# EAGLE board SOIC_TSSOP-16 adapter_and_proto (EAGLE 7.3.0)
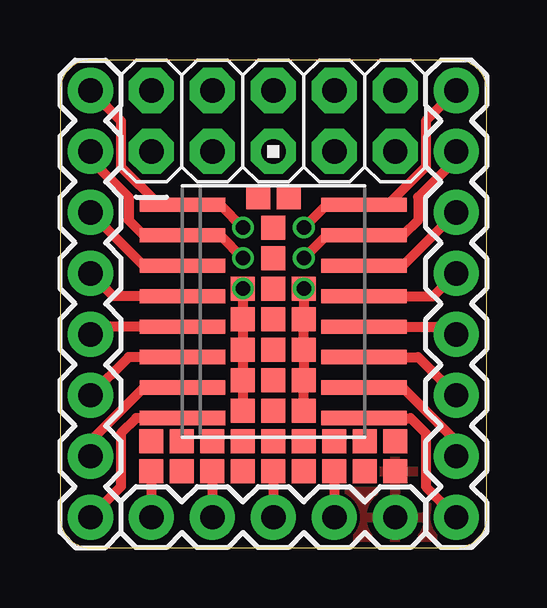
[diagram p0: board, top side]
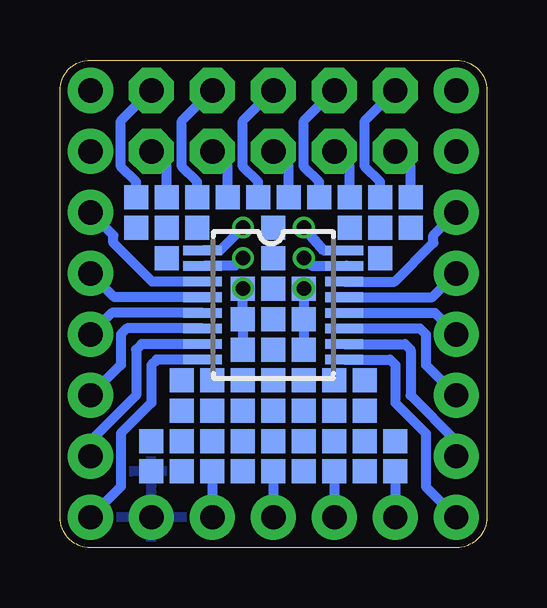
[diagram p1: board, bottom side, seen from below]

Size 17.78 x 20.32 mm. Coordinates in mm from the lower left corner, seen from the top.
Outline: 16.51,20.32 1.27,20.32 arc90 0,19.05 0,1.27 arc90 1.27,0 16.51,0 arc90 17.78,1.27 17.78,19.05 arc90 16.51,20.32
Copper layers (1*16): Top 0.035mm / dielectric 1.5mm / Bottom 0.035mm
Design rules "dirt_cheap_dirty_boards.v1": minimum track width 5mil, minimum drill 12mil, track to track 5mil, track to pad 5mil, pad to pad 5mil, via to via 5mil, smd to smd 0mil, copper to edge 10mil, drill to drill 10mil, minimum pad ring 10mil, minimum via ring 6mil, stop-mask expansion 2mil, vias tented up to drill 25mil, thermal gap 10mil

## Footprints (pad centres in the part's own frame; a part is rotated, then mirrored left to right if it is on the bottom)
1X08_ROUND = drill 1.016 pad 1.88: 1 0,0; 2 2.54,0; 3 5.08,0; 4 7.62,0; 5 10.16,0; 6 12.7,0; 7 15.24,0; 8 17.78,0
AVR_ICSP = drill 1.016 pad 1.88 octagon: 1 -1.27,5.08; 2 1.27,5.08; 3 -1.27,2.54; 4 1.27,2.54; 5 -1.27,0; 6 1.27,0; 7 -1.27,-2.54; 8 1.27,-2.54; 9 -1.27,-5.08; 10 1.27,-5.08
1X05 = drill 1.016 pad 1.88: 1 0,0; 2 2.54,0; 3 5.08,0; 4 7.62,0; 5 10.16,0
SOIC-16NW = smd 0.6 x 3.56: P1 -4.445,-3.78; P2 -3.175,-3.78; P3 -1.905,-3.78; P4 -0.635,-3.78; P5 0.635,-3.78; P6 1.905,-3.78; P7 3.175,-3.78; P8 4.445,-3.78; P9 4.445,3.78; P10 3.175,3.78; P11 1.905,3.78; P12 0.635,3.78; P13 -0.635,3.78; P14 -1.905,3.78; P15 -3.175,3.78; P16 -4.445,3.78
TP10SQ = smd 1 x 1: TP 0,0
TSSOP16 = smd 0.4 x 1.6: 1 -2.225,-2.85; 2 -1.575,-2.85; 3 -0.925,-2.85; 4 -0.275,-2.85; 5 0.375,-2.85; 6 1.025,-2.85; 7 1.675,-2.85; 8 2.325,-2.85; 9 2.325,3.05; 10 1.675,3.05; 11 1.025,3.05; 12 0.375,3.05; 13 -0.275,3.05; 14 -0.925,3.05; 15 -1.575,3.05; 16 -2.225,3.05

## Placement (x,y rotation side)
JP1  [1X08_ROUND]  1.27,1.27 90 top
JP2  [1X08_ROUND]  16.51,19.05 270 top
JP3  [AVR_ICSP]  8.89,17.78 90 top
JP4  [1X05]  3.81,1.27 0 top
SOIC-16  [SOIC-16NW]  8.89,9.84 270 top
TP1  TPSQTP10SQ  [TP10SQ]  3.17,14.61 0 bottom
TP2  TPSQTP10SQ  [TP10SQ]  5.71,14.61 0 bottom
TP3  TPSQTP10SQ  [TP10SQ]  8.26,14.61 0 bottom
TP4  TPSQTP10SQ  [TP10SQ]  10.79,14.61 0 bottom
TP5  TPSQTP10SQ  [TP10SQ]  13.34,14.61 0 bottom
TP6  TPSQTP10SQ  [TP10SQ]  4.45,14.61 0 bottom
TP7  TPSQTP10SQ  [TP10SQ]  6.99,14.61 0 bottom
TP8  TPSQTP10SQ  [TP10SQ]  9.53,14.61 0 bottom
TP9  TPSQTP10SQ  [TP10SQ]  12.06,14.61 0 bottom
TP10  TPSQTP10SQ  [TP10SQ]  14.61,14.61 0 bottom
TP11  TPSQTP10SQ  [TP10SQ]  13.97,3.17 0 bottom
TP12  TPSQTP10SQ  [TP10SQ]  11.43,3.17 0 top
TP13  TPSQTP10SQ  [TP10SQ]  8.89,3.17 0 top
TP14  TPSQTP10SQ  [TP10SQ]  6.35,3.17 0 top
TP15  TPSQTP10SQ  [TP10SQ]  3.81,3.17 0 top
TP16  TPSQTP10SQ  [TP10SQ]  11.43,3.17 0 bottom
TP17  TPSQTP10SQ  [TP10SQ]  8.89,3.17 0 bottom
TP18  TPSQTP10SQ  [TP10SQ]  6.35,3.17 0 bottom
TP19  TPSQTP10SQ  [TP10SQ]  3.81,3.17 0 bottom
TP20  TPSQTP10SQ  [TP10SQ]  13.97,3.17 0 top
TP21  TPSQTP10SQ  [TP10SQ]  12.7,3.17 0 bottom
TP22  TPSQTP10SQ  [TP10SQ]  10.16,3.17 0 bottom
TP23  TPSQTP10SQ  [TP10SQ]  7.62,3.17 0 bottom
TP24  TPSQTP10SQ  [TP10SQ]  5.08,3.17 0 bottom
TP25  TPSQTP10SQ  [TP10SQ]  7.62,10.79 0 bottom
TP26  TPSQTP10SQ  [TP10SQ]  7.62,9.53 0 bottom
TP27  TPSQTP10SQ  [TP10SQ]  7.62,8.26 0 bottom
TP28  TPSQTP10SQ  [TP10SQ]  10.16,10.79 0 bottom
TP29  TPSQTP10SQ  [TP10SQ]  10.16,9.53 0 bottom
TP30  TPSQTP10SQ  [TP10SQ]  10.16,8.26 0 bottom
TP31  TPSQTP10SQ  [TP10SQ]  10.16,10.79 0 top
TP32  TPSQTP10SQ  [TP10SQ]  10.16,9.53 0 top
TP33  TPSQTP10SQ  [TP10SQ]  10.16,8.26 0 top
TP34  TPSQTP10SQ  [TP10SQ]  10.16,6.99 0 top
TP35  TPSQTP10SQ  [TP10SQ]  10.16,5.71 0 top
TP36  TPSQTP10SQ  [TP10SQ]  7.62,10.79 0 top
TP37  TPSQTP10SQ  [TP10SQ]  7.62,9.53 0 top
TP38  TPSQTP10SQ  [TP10SQ]  7.62,8.26 0 top
TP39  TPSQTP10SQ  [TP10SQ]  7.62,6.99 0 top
TP40  TPSQTP10SQ  [TP10SQ]  7.62,5.71 0 top
TP41  TPSQTP10SQ  [TP10SQ]  5.08,3.17 0 top
TP42  TPSQTP10SQ  [TP10SQ]  7.62,3.17 0 top
TP43  TPSQTP10SQ  [TP10SQ]  10.16,3.17 0 top
TP44  TPSQTP10SQ  [TP10SQ]  12.7,3.17 0 top
TP45  TPSQTP10SQ  [TP10SQ]  8.89,5.71 0 top
TP46  TPSQTP10SQ  [TP10SQ]  8.89,6.99 0 top
TP47  TPSQTP10SQ  [TP10SQ]  8.89,8.26 0 top
TP48  TPSQTP10SQ  [TP10SQ]  7.62,4.45 0 top
TP49  TPSQTP10SQ  [TP10SQ]  6.35,4.45 0 top
TP50  TPSQTP10SQ  [TP10SQ]  8.89,12.06 0 top
TP51  TPSQTP10SQ  [TP10SQ]  8.89,13.34 0 top
TP52  TPSQTP10SQ  [TP10SQ]  8.89,4.45 0 top
TP53  TPSQTP10SQ  [TP10SQ]  10.16,4.45 0 top
TP54  TPSQTP10SQ  [TP10SQ]  5.08,4.45 0 top
TP55  TPSQTP10SQ  [TP10SQ]  11.43,4.45 0 top
TP56  TPSQTP10SQ  [TP10SQ]  12.7,4.45 0 top
TP57  TPSQTP10SQ  [TP10SQ]  8.26,14.61 0 top
TP58  TPSQTP10SQ  [TP10SQ]  9.53,14.61 0 top
TP59  TPSQTP10SQ  [TP10SQ]  8.89,12.06 0 bottom
TP60  TPSQTP10SQ  [TP10SQ]  8.89,13.34 0 bottom
TP61  TPSQTP10SQ  [TP10SQ]  5.71,13.34 0 bottom
TP62  TPSQTP10SQ  [TP10SQ]  4.45,13.34 0 bottom
TP63  TPSQTP10SQ  [TP10SQ]  4.45,12.06 0 bottom
TP64  TPSQTP10SQ  [TP10SQ]  12.06,13.34 0 bottom
TP65  TPSQTP10SQ  [TP10SQ]  13.34,13.34 0 bottom
TP66  TPSQTP10SQ  [TP10SQ]  13.34,12.06 0 bottom
TP67  TPSQTP10SQ  [TP10SQ]  14.61,13.34 0 bottom
TP68  TPSQTP10SQ  [TP10SQ]  3.17,13.34 0 bottom
TP69  TPSQTP10SQ  [TP10SQ]  8.89,8.26 0 bottom
TP70  TPSQTP10SQ  [TP10SQ]  5.08,6.99 0 bottom
TP71  TPSQTP10SQ  [TP10SQ]  5.08,5.71 0 bottom
TP72  TPSQTP10SQ  [TP10SQ]  5.08,4.45 0 bottom
TP73  TPSQTP10SQ  [TP10SQ]  6.35,4.45 0 bottom
TP74  TPSQTP10SQ  [TP10SQ]  6.35,5.71 0 bottom
TP75  TPSQTP10SQ  [TP10SQ]  6.35,6.99 0 bottom
TP76  TPSQTP10SQ  [TP10SQ]  7.62,6.99 0 bottom
TP77  TPSQTP10SQ  [TP10SQ]  7.62,5.71 0 bottom
TP78  TPSQTP10SQ  [TP10SQ]  7.62,4.45 0 bottom
TP79  TPSQTP10SQ  [TP10SQ]  8.89,4.45 0 bottom
TP80  TPSQTP10SQ  [TP10SQ]  8.89,5.71 0 bottom
TP81  TPSQTP10SQ  [TP10SQ]  8.89,6.99 0 bottom
TP82  TPSQTP10SQ  [TP10SQ]  10.16,6.99 0 bottom
TP83  TPSQTP10SQ  [TP10SQ]  10.16,5.71 0 bottom
TP84  TPSQTP10SQ  [TP10SQ]  10.16,4.45 0 bottom
TP85  TPSQTP10SQ  [TP10SQ]  11.43,4.45 0 bottom
TP86  TPSQTP10SQ  [TP10SQ]  11.43,5.71 0 bottom
TP87  TPSQTP10SQ  [TP10SQ]  11.43,6.99 0 bottom
TP88  TPSQTP10SQ  [TP10SQ]  12.7,4.45 0 bottom
TP89  TPSQTP10SQ  [TP10SQ]  12.7,5.71 0 bottom
TP90  TPSQTP10SQ  [TP10SQ]  12.7,6.99 0 bottom
TP91  TPSQTP10SQ  [TP10SQ]  3.81,4.45 0 bottom
TP92  TPSQTP10SQ  [TP10SQ]  13.97,4.45 0 bottom
TP93  TPSQTP10SQ  [TP10SQ]  8.89,9.53 0 bottom
TP94  TPSQTP10SQ  [TP10SQ]  8.89,10.79 0 bottom
TP95  TPSQTP10SQ  [TP10SQ]  8.89,10.79 0 top
TP96  TPSQTP10SQ  [TP10SQ]  8.89,9.53 0 top
TP97  TPSQTP10SQ  [TP10SQ]  3.81,4.45 0 top
TP98  TPSQTP10SQ  [TP10SQ]  13.97,4.45 0 top
TSSOP-16  [TSSOP16]  8.99,10.16 270 bottom

## Library data of the parts
JP1-JP4 = SparkFun-Connectors
SOIC-16 = dp_devices
TP1-TP98 = testpad
TSSOP-16 = Kevin-GenericICFootprints

## Nets
1: JP1.8 SOIC-16.P1 TSSOP-16.16
2: JP1.7 SOIC-16.P2 TSSOP-16.15
3: JP1.6 SOIC-16.P3 TSSOP-16.14
4: JP1.5 SOIC-16.P4 TSSOP-16.13
5: JP1.4 SOIC-16.P5 TSSOP-16.12
6: JP1.3 SOIC-16.P6 TSSOP-16.11
7: JP1.2 SOIC-16.P7 TSSOP-16.10
8: JP1.1 SOIC-16.P8 TSSOP-16.9
9: JP2.8 SOIC-16.P9 TSSOP-16.8
10: JP2.7 SOIC-16.P10 TSSOP-16.7
11: JP2.6 SOIC-16.P11 TSSOP-16.6
12: JP2.5 SOIC-16.P12 TSSOP-16.5
13: JP2.4 SOIC-16.P13 TSSOP-16.4
14: JP2.3 SOIC-16.P14 TSSOP-16.3
15: JP2.2 SOIC-16.P15 TSSOP-16.2
16: JP2.1 SOIC-16.P16 TSSOP-16.1
D+: JP4.3 TP13.TP TP17.TP
D-: JP4.2 TP14.TP TP18.TP
GND: JP4.5 TP11.TP TP20.TP
ID: JP4.4 TP12.TP TP16.TP
N$1: JP3.1 TP1.TP
N$2: JP3.3 TP2.TP
N$3: JP3.5 TP3.TP
N$4: JP3.7 TP4.TP
N$5: JP3.9 TP5.TP
N$6: JP3.2 TP6.TP
N$7: JP3.4 TP7.TP
N$8: JP3.6 TP8.TP
N$9: JP3.8 TP9.TP
N$10: JP3.10 TP10.TP
RAIL1: TP25.TP TP26.TP TP27.TP TP36.TP TP37.TP TP38.TP TP39.TP TP40.TP
RAIL2: TP28.TP TP29.TP TP30.TP TP31.TP TP32.TP TP33.TP TP34.TP TP35.TP
VDD: JP4.1 TP15.TP TP19.TP

## Tracks (layer width: path | path; a pad name or v marks a point on that pad's centre or on a via)
1  (via drill 0.6)
  Top 0.406: JP1.8 2.54,17.78 2.54,15.88 4.13,14.29 SOIC-16.P1 6.67,14.29 v7.62,13.34
  Bottom 0.406: v7.62,13.34 6.79,12.38 TSSOP-16.16
2  (via drill 0.6)
  Top 0.406: JP1.7 1.27,16.19 2.86,14.61 2.86,13.65 3.49,13.02 SOIC-16.P2 6.67,13.02 v7.62,12.06
  Bottom 0.406: v7.62,12.06 7.3,11.75 5.85,11.75 TSSOP-16.15
3
  Top 0.406: JP1.6 3.49,11.75 SOIC-16.P3
  Bottom 0.406: TSSOP-16.14 3.84,11.09 2.22,12.7 2.22,13.02 JP1.6
4
  Top 0.406: SOIC-16.P4 2.22,10.48 JP1.5
  Bottom 0.406: TSSOP-16.13 2.27,10.44 JP1.5
5
  Top 0.406: SOIC-16.P5 1.59,9.21 JP1.4
  Bottom 0.406: TSSOP-16.12 2.17,9.79 JP1.4
6
  Top 0.406: SOIC-16.P6 2.86,7.94 JP1.3
  Bottom 0.406: TSSOP-16.11 2.79,9.13 2.54,8.89 2.54,7.62 JP1.3
7
  Top 0.406: SOIC-16.P7 3.49,6.67 1.27,4.45 JP1.2
  Bottom 0.406: TSSOP-16.10 3.4,8.48 3.17,8.26 3.17,6.35 1.27,4.45 JP1.2
8
  Top 0.406: SOIC-16.P8 3.17,5.4 2.54,4.76 2.54,2.54 JP1.1
  Bottom 0.406: TSSOP-16.9 4.03,7.83 3.81,7.62 3.81,6.03 2.54,4.76 2.54,2.54 JP1.1
9
  Top 0.406: SOIC-16.P9 14.61,5.4 15.24,4.76 15.24,2.54 JP2.8
  Bottom 0.406: TSSOP-16.8 13.76,7.83 13.97,7.62 13.97,6.03 15.24,4.76 15.24,2.54 JP2.8
10
  Top 0.406: SOIC-16.P10 14.29,6.67 16.51,4.45 JP2.7
  Bottom 0.406: TSSOP-16.7 14.38,8.48 14.61,8.26 14.61,6.35 16.51,4.45 JP2.7
11
  Top 0.406: SOIC-16.P11 14.92,7.94 JP2.6
  Bottom 0.406: TSSOP-16.6 14.99,9.13 15.24,8.89 15.24,7.62 JP2.6
12
  Top 0.406: SOIC-16.P12 16.19,9.21 JP2.5
  Bottom 0.406: TSSOP-16.5 15.62,9.79 JP2.5
13
  Top 0.406: SOIC-16.P13 15.56,10.48 JP2.4
  Bottom 0.406: TSSOP-16.4 15.52,10.44 JP2.4
14
  Top 0.406: JP2.3 14.29,11.75 SOIC-16.P14
  Bottom 0.406: TSSOP-16.3 13.94,11.09 15.56,12.7 15.56,13.02 JP2.3
15  (via drill 0.6)
  Top 0.406: JP2.2 16.51,16.19 14.92,14.61 14.92,13.65 14.29,13.02 SOIC-16.P15 11.11,13.02 v10.16,12.06
  Bottom 0.406: v10.16,12.06 10.48,11.75 11.73,11.75 TSSOP-16.2
16  (via drill 0.6)
  Top 0.406: JP2.1 15.24,17.78 15.24,15.88 13.65,14.29 SOIC-16.P16 11.11,14.29 v10.16,13.34
  Bottom 0.406: v10.16,13.34 11.11,12.38 TSSOP-16.1
D+
  Top 0.406: TP13.TP JP4.3
  Bottom 0.406: TP13.TP JP4.3
D-
  Top 0.406: TP14.TP JP4.2
  Bottom 0.406: TP14.TP JP4.2
GND
  pour Bottom: 0,20.32 17.78,20.32 17.78,0 0,0
  pour Top: 0,20.32 17.78,20.32 17.78,0 0,0
ID
  Top 0.406: TP12.TP JP4.4
  Bottom 0.406: TP12.TP JP4.4
N$1
  Bottom 0.406: TP1.TP 3.17,15.88 JP3.1
N$2
  Bottom 0.406: TP2.TP 5.71,15.88 JP3.3
N$3
  Bottom 0.406: TP3.TP 8.26,15.88 JP3.5
N$4
  Bottom 0.406: TP4.TP 10.79,15.88 JP3.7
N$5
  Bottom 0.406: TP5.TP 13.34,15.88 JP3.9
N$6
  Bottom 0.406: TP6.TP 4.45,15.24 5.08,15.88 5.08,17.78 JP3.2
N$7
  Bottom 0.406: TP7.TP 6.99,15.24 7.62,15.88 7.62,17.78 JP3.4
N$8
  Bottom 0.406: TP8.TP 9.53,15.24 10.16,15.88 10.16,17.78 JP3.6
N$9
  Bottom 0.406: TP9.TP 12.06,15.24 12.7,15.88 12.7,17.78 JP3.8
N$10
  Bottom 0.406: TP10.TP 14.61,15.24 15.24,15.88 15.24,17.78 JP3.10
RAIL1  (via drill 0.6)
  Top 0.406: TP25.TP TP26.TP TP27.TP TP39.TP TP40.TP
  Bottom 0.406: TP25.TP TP26.TP TP27.TP
  other vias: 7.62,10.79
RAIL2  (via drill 0.6)
  Top 0.406: TP35.TP TP34.TP TP30.TP TP29.TP TP28.TP
  Bottom 0.406: TP30.TP TP29.TP TP28.TP
  other vias: 10.16,10.79
VDD
  Top 0.406: TP15.TP JP4.1
  Bottom 0.406: TP15.TP JP4.1